# EAGLE board SparkFun GPS NEO_M9N_SMA-Panel (EAGLE 9.6.2), part 1 of 2
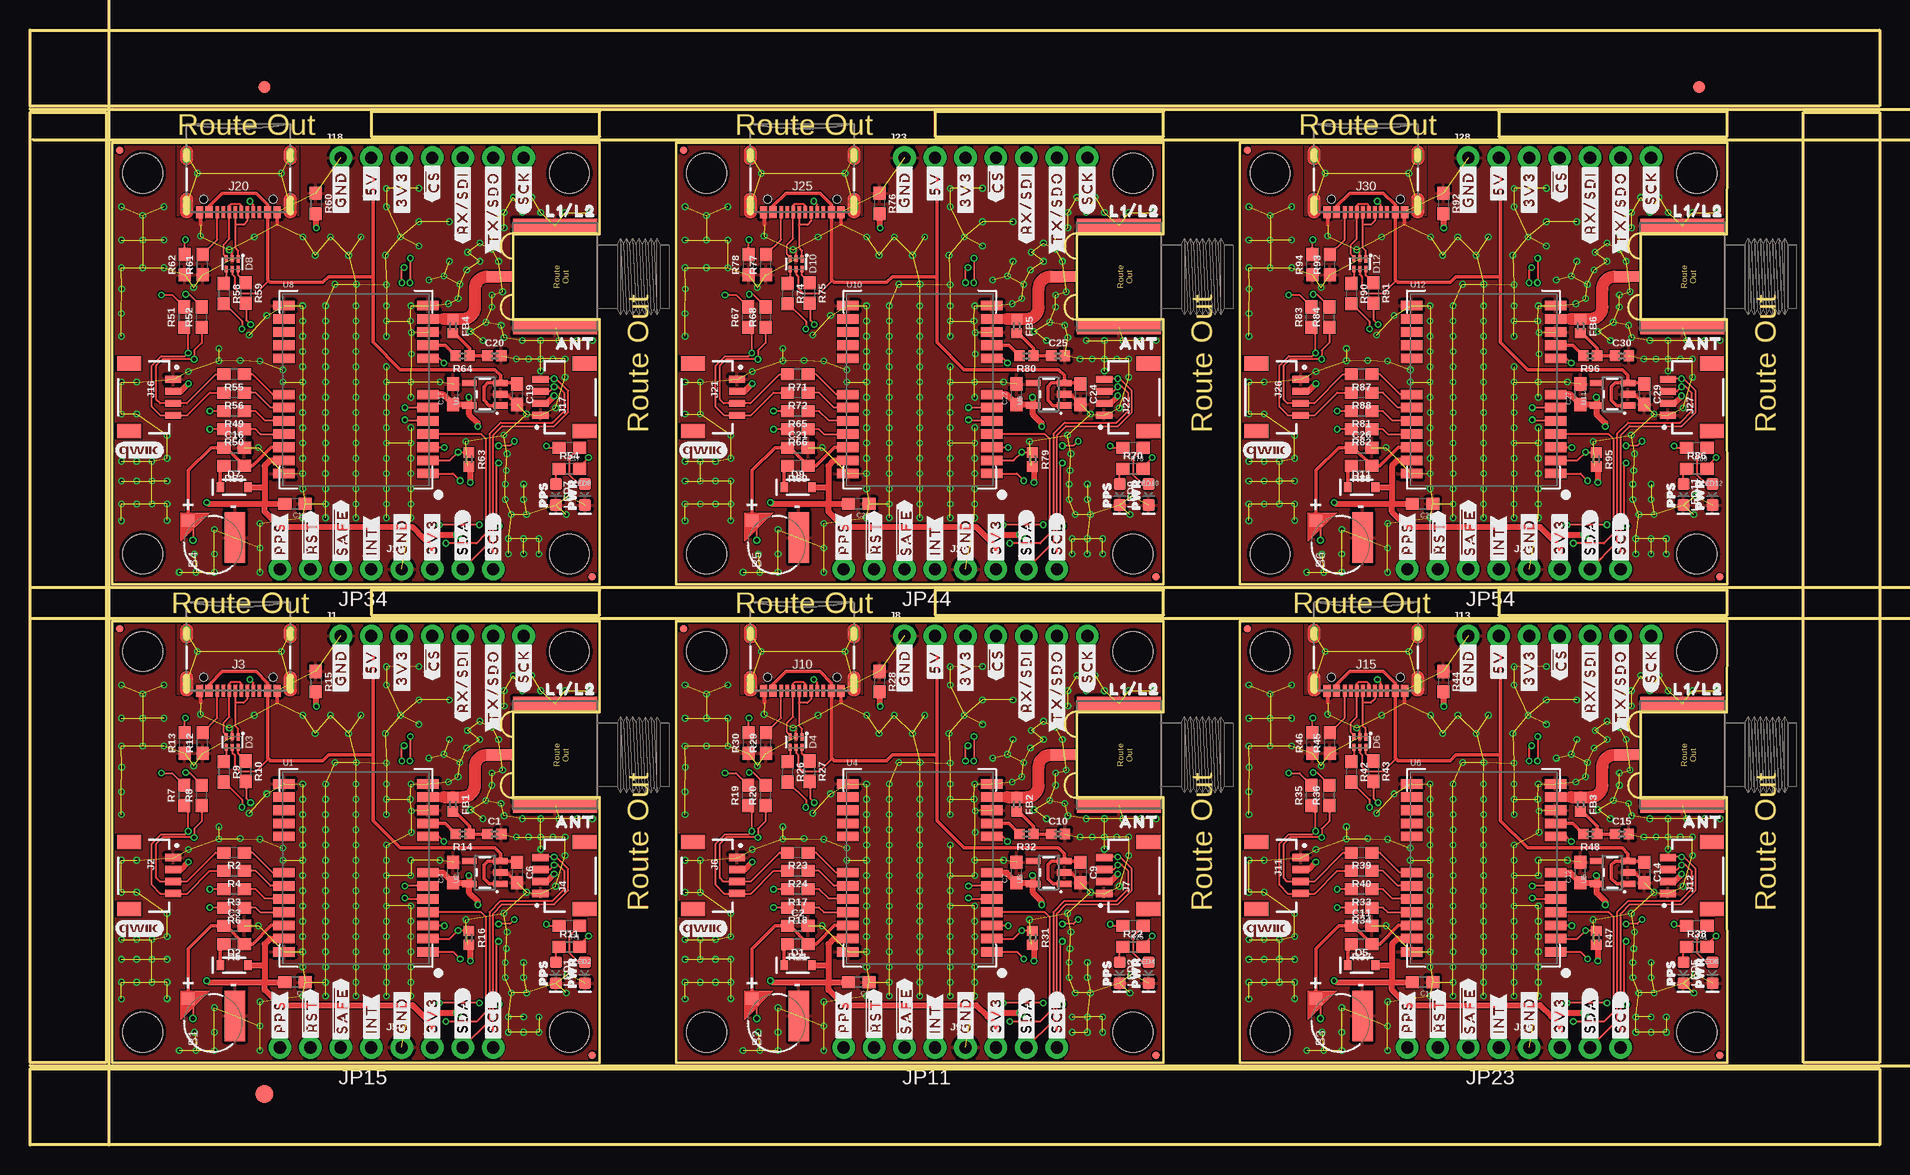
[diagram p0: board, top side]
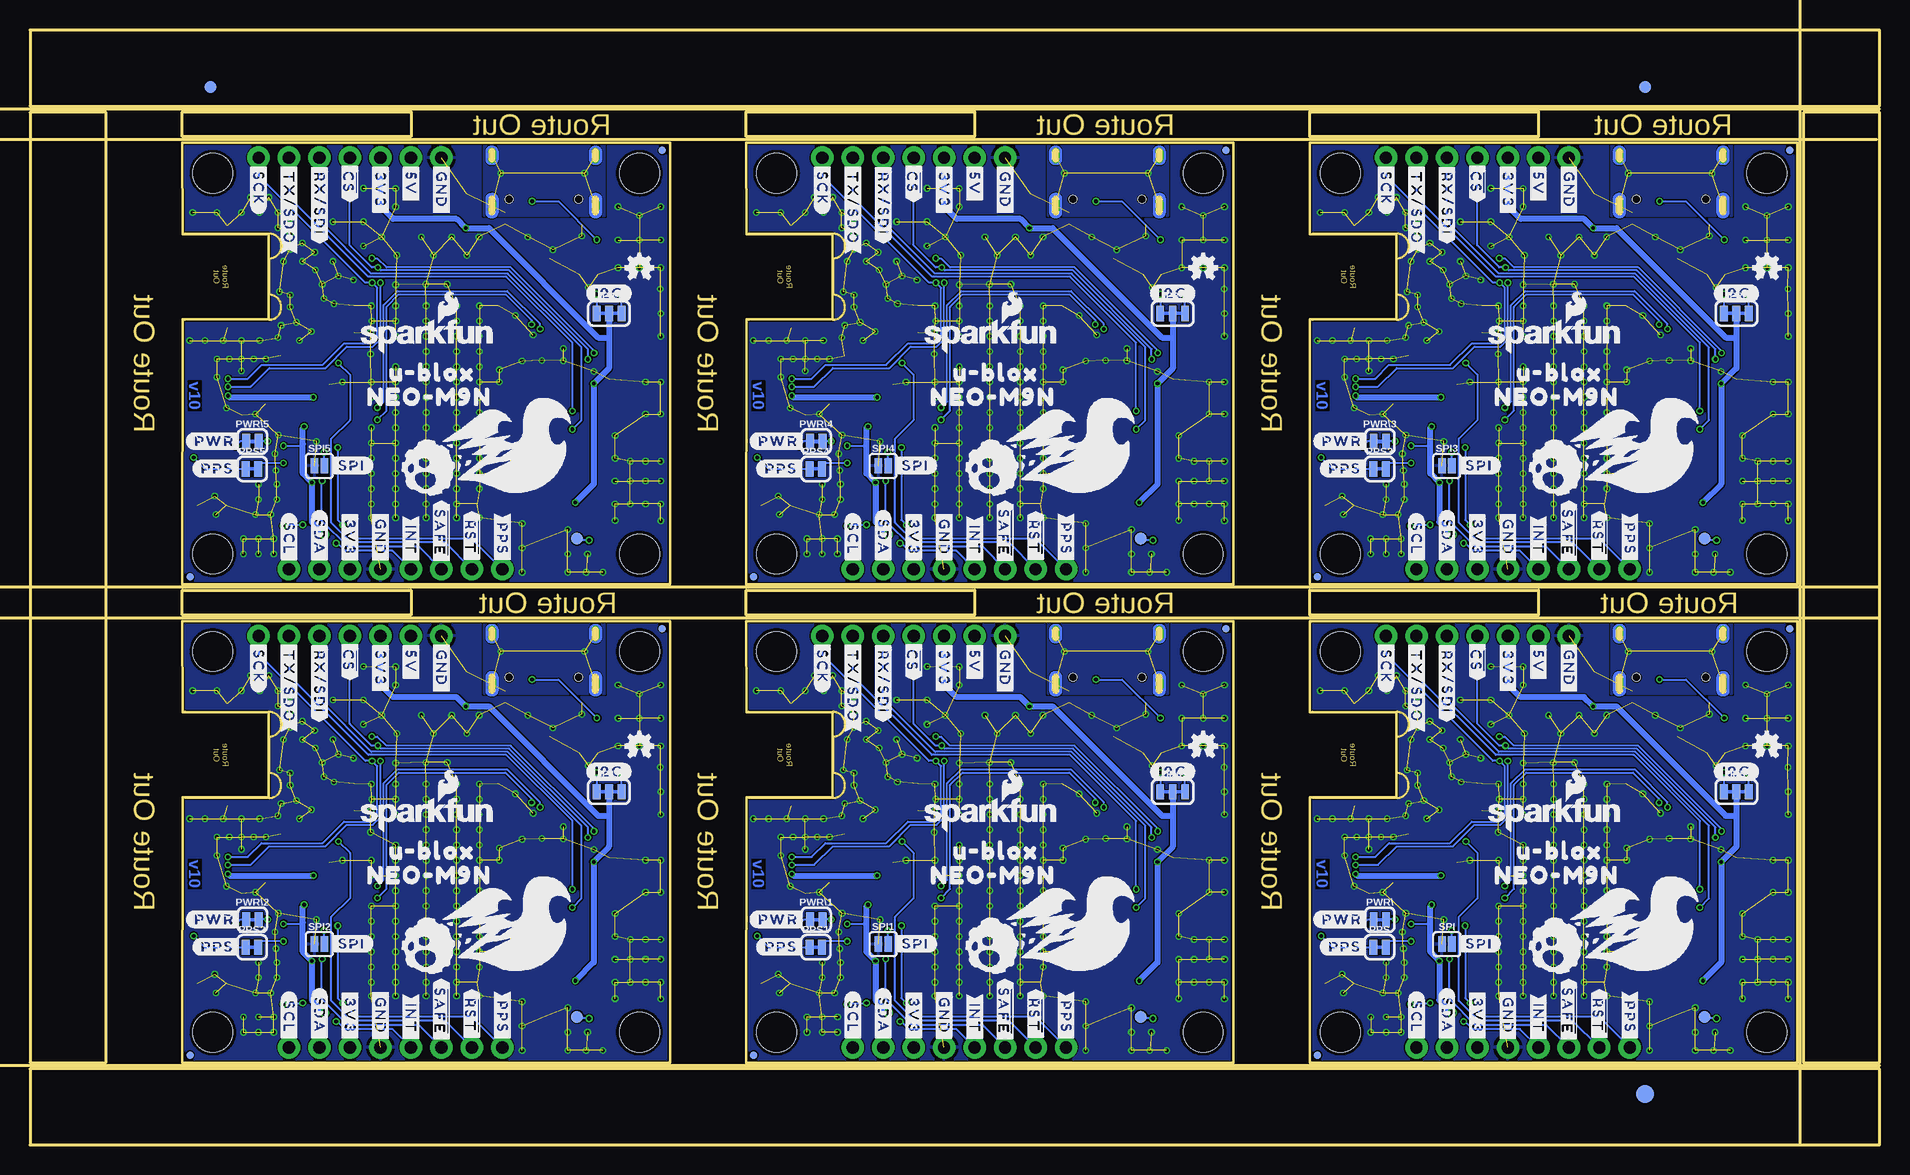
[diagram p1: board, bottom side, seen from below]

Size 154.18 x 92.91 mm. Coordinates in mm from the lower left corner, seen from the top.
Outline: 6.86,6.86 6.86,43.66 47.5,43.66 47.47,36.04 40.28,36.04 40.28,28.96 47.47,28.96 47.5,6.86 6.86,6.86
Outline: 53.85,6.86 53.85,43.66 94.49,43.66 94.46,36.04 87.27,36.04 87.27,28.96 94.46,28.96 94.49,6.86 53.85,6.86
Outline: 100.84,6.86 100.84,43.66 141.48,43.66 141.45,36.04 134.26,36.04 134.26,28.96 141.45,28.96 141.48,6.86 100.84,6.86
Outline: 6.86,46.71 6.86,83.52 47.5,83.52 47.47,75.9 40.28,75.9 40.28,68.81 47.47,68.81 47.5,46.71 6.86,46.71
Outline: 53.85,46.71 53.85,83.52 94.49,83.52 94.46,75.9 87.27,75.9 87.27,68.81 94.46,68.81 94.49,46.71 53.85,46.71
Outline: 100.84,46.71 100.84,83.52 141.48,83.52 141.45,75.9 134.26,75.9 134.26,68.81 141.45,68.81 141.48,46.71 100.84,46.71
Outline: 0,6.35 154.18,6.35 154.18,0 0,0 0,6.35
Outline: 147.83,86.06 154.18,86.06 154.18,6.86 147.83,6.86 147.83,86.06
Outline: 0,92.91 154.18,92.91 154.18,86.56 0,86.56 0,92.91
Outline: 0,86.06 6.35,86.06 6.35,6.86 0,6.86 0,86.06
Outline: 75.44,86.11 75.44,84.02 94.49,84.02 94.49,86.11 75.44,86.11
Outline: 28.45,86.11 28.45,84.02 47.5,84.02 47.5,86.11 28.45,86.11
Outline: 28.45,46.23 28.45,44.14 47.5,44.14 47.5,46.23 28.45,46.23
Outline: 75.44,46.23 75.44,44.14 94.49,44.14 94.49,46.23 75.44,46.23
Outline: 122.43,46.23 122.43,44.14 141.48,44.14 141.48,46.23 122.43,46.23
Outline: 122.43,86.11 122.43,84.02 141.48,84.02 141.48,86.11 122.43,86.11
Copper layers (1*16): Top 0.035mm / dielectric 1.5mm / Bottom 0.035mm
Design rules "SparkFun GPS NEO_M9N_SMA": minimum track width 4mil, minimum drill 6mil, track to track 4mil, track to pad 4mil, pad to pad 4mil, via to via 4mil, smd to smd 4mil, copper to edge 4mil, drill to drill 4mil, minimum pad ring 5mil, minimum via ring 5mil, stop-mask expansion 4mil, vias tented up to drill 25mil, thermal gap 10mil
Net classes: 2 3.3V: width 0.508 mm; 3 Antenna: width 1 mm, clearance 0.3 mm
Milling: 6 lines

## Footprints (pad centres in the part's own frame; a part is rotated, then mirrored left to right if it is on the bottom)
ML414H_IV01E = smd 1 x 1: + 2.022,2.032 | smd 4.2 x 1.7: - 0.6,-1.85
0402 = smd 0.85 x 0.9: 1 -0.58,0; 2 0.58,0
0603 = smd 1.1 x 1: 1 -0.85,0; 2 0.85,0
SOD-323 = smd 0.63 x 0.83: A 1.15,0; C -1.15,0
SOT886 = smd 0.61 x 0.25: 1 -0.405,0.5 | smd 0.56 x 0.25: 2 -0.43,0; 3 -0.43,-0.5; 4 0.43,-0.5; 5 0.43,0; 6 0.43,0.5
SMA-EDGE-SMD = smd 1.15 x 7: GND@0 -4.25,-3.5; GND@1 4.25,-3.5 | smd 0.9 x 2.2: SIG 0,-8.1
FIDUCIAL-1X2 = smd 1 x 1: 1 0,0
FIDUCIAL-1.5X3 = smd 1.5 x 1.5: 1 0,0
1X07_NO_SILK = drill 1.016 pad 1.88: 1 0,0; 2 2.54,0; 3 5.08,0; 4 7.62,0; 5 10.16,0; 6 12.7,0; 7 15.24,0
JST04_1MM_RA = smd 0.6 x 1.35: 1 -1.5,0; 2 -0.5,0; 3 0.5,0; 4 1.5,0 | smd 1.2 x 2: NC1 2.8,-3.675; NC2 -2.8,-3.675
USB-C-16P-2LAYER-PADS = smd 0.3 x 1: A5 -1.25,-0.34; A6 -0.25,-0.34; A7 0.25,-0.34; A8 1.25,-0.34; B5 1.75,-0.34; B6 0.75,-0.34; B7 -0.75,-0.34; B8 -1.75,-0.34 | smd 0.6 x 1: GND -3.225,-0.34; GND2 3.225,-0.34; VBUS1 -2.45,-0.34; VBUS2 2.45,-0.34 | drill 0.4 pad 0.6 long: SHLD1 -4.318,-0.915; SHLD2 4.318,-0.915; SHLD3 -4.318,-5.095; SHLD4 4.318,-5.095 | hole 0.65: -2.89,-1.445; 2.89,-1.445
1X04_NO_SILK = drill 1.016 pad 1.88: 1 0,0; 2 2.54,0; 3 5.08,0; 4 7.62,0
STAND-OFF = hole 3.302: 0,0
MICRO-FIDUCIAL = smd 0.635 x 0.635: 1 0,0
SMT-JUMPER_3_2-NC_TRACE_SILK = smd 0.66 x 1.27: 1 -1.041,0; 2 0,0; 3 1.041,0
LED-0603 = smd 1 x 1: A -0.877,0; C 0.877,0
SMT-JUMPER_2_NC_TRACE_SILK = smd 0.66 x 1.27: 1 -0.521,0; 2 0.521,0
SMT-JUMPER_2_NO_SILK = smd 0.635 x 1.27: 1 -0.406,0; 2 0.406,0
PAD.03X.04 = smd 1.016 x 1.016: P$1 0,0
NEO-M9N/M8T/M8U = smd 1.8 x 0.8: 1 6,-7; 2 6,-5.9; 3 6,-4.8; 4 6,-3.7; 5 6,-2.6; 6 6,-1.5; 7 6,-0.4; 8 6,2.6; 9 6,3.7; 10 6,4.8; 11 6,5.9; 12 6,7; 13 -6,7; 14 -6,5.9; 15 -6,4.8; 16 -6,3.7; 17 -6,2.6; 18 -6,-0.4; 19 -6,-1.5; 20 -6,-2.6; 21 -6,-3.7; 22 -6,-4.8; 23 -6,-5.9; 24 -6,-7
SOT23-5 = smd 0.55 x 1.2: 1 -0.95,-1.3; 2 0,-1.3; 3 0.95,-1.3; 4 0.95,1.3; 5 -0.95,1.3

## Placement (x,y rotation side)
B1  6.8MM_COIN_CELL  [ML414H_IV01E]  15.24,10.16 90 top
B2  6.8MM_COIN_CELL  [ML414H_IV01E]  62.23,10.16 90 top
B3  6.8MM_COIN_CELL  [ML414H_IV01E]  109.22,10.16 90 top
B4  6.8MM_COIN_CELL  [ML414H_IV01E]  15.24,50.01 90 top
B5  6.8MM_COIN_CELL  [ML414H_IV01E]  62.23,50.01 90 top
B6  6.8MM_COIN_CELL  [ML414H_IV01E]  109.22,50.01 90 top
C1  47pF  [0402]  38.71,25.91 0 top
C2  1.0uF  [0603]  64.01,18.26 0 top
C3  1.0uF  [0603]  17.02,18.26 0 top
C4  1.0uF  [0603]  35.26,22.71 90 top
C5  0.1uF  [0603]  22.1,13.56 180 top
C6  1.0uF  [0603]  40.59,22.71 270 top
C7  1.0uF  [0603]  82.25,22.71 90 top
C8  0.1uF  [0603]  69.09,13.56 180 top
C9  1.0uF  [0603]  87.58,22.71 270 top
C10  47pF  [0402]  85.7,25.91 0 top
C11  1.0uF  [0603]  111,18.26 0 top
C12  1.0uF  [0603]  129.24,22.71 90 top
C13  0.1uF  [0603]  116.08,13.56 180 top
C14  1.0uF  [0603]  134.57,22.71 270 top
C15  47pF  [0402]  132.69,25.91 0 top
C16  1.0uF  [0603]  17.02,58.12 0 top
C17  1.0uF  [0603]  35.26,62.56 90 top
C18  0.1uF  [0603]  22.1,53.42 180 top
C19  1.0uF  [0603]  40.59,62.56 270 top
C20  47pF  [0402]  38.71,65.76 0 top
C21  1.0uF  [0603]  64.01,58.12 0 top
C22  1.0uF  [0603]  82.25,62.56 90 top
C23  0.1uF  [0603]  69.09,53.42 180 top
C24  1.0uF  [0603]  87.58,62.56 270 top
C25  47pF  [0402]  85.7,65.76 0 top
C26  1.0uF  [0603]  111,58.12 0 top
C27  1.0uF  [0603]  129.24,62.56 90 top
C28  0.1uF  [0603]  116.08,53.42 180 top
C29  1.0uF  [0603]  134.57,62.56 270 top
C30  47pF  [0402]  132.69,65.76 0 top
D1  0.5A/40V/420mV  [SOD-323]  64.01,14.96 0 top
D2  0.5A/40V/420mV  [SOD-323]  17.02,14.96 0 top
D3  PRTR5V0U2F  [SOT886]  16.87,33.58 270 top
D4  PRTR5V0U2F  [SOT886]  63.86,33.58 270 top
D5  0.5A/40V/420mV  [SOD-323]  111,14.96 0 top
D6  PRTR5V0U2F  [SOT886]  110.85,33.58 270 top
D7  0.5A/40V/420mV  [SOD-323]  17.02,54.81 0 top
D8  PRTR5V0U2F  [SOT886]  16.87,73.43 270 top
D9  0.5A/40V/420mV  [SOD-323]  64.01,54.81 0 top
D10  PRTR5V0U2F  [SOT886]  63.86,73.43 270 top
D11  0.5A/40V/420mV  [SOD-323]  111,54.81 0 top
D12  PRTR5V0U2F  [SOT886]  110.85,73.43 270 top
E1  ANTENNA-GROUNDEDEDGE_SMA_SMD  [SMA-EDGE-SMD]  47.27,32.51 270 top
E2  ANTENNA-GROUNDEDEDGE_SMA_SMD  [SMA-EDGE-SMD]  94.26,32.51 270 top
E3  ANTENNA-GROUNDEDEDGE_SMA_SMD  [SMA-EDGE-SMD]  141.25,32.51 270 top
E4  ANTENNA-GROUNDEDEDGE_SMA_SMD  [SMA-EDGE-SMD]  47.27,72.36 270 top
E5  ANTENNA-GROUNDEDEDGE_SMA_SMD  [SMA-EDGE-SMD]  94.26,72.36 270 top
E6  ANTENNA-GROUNDEDEDGE_SMA_SMD  [SMA-EDGE-SMD]  141.25,72.36 270 top
E$1  [FIDUCIAL-1X2]  19.56,88.15 0 top
E$2  [FIDUCIAL-1X2]  19.56,88.15 0 bottom
E$3  [FIDUCIAL-1X2]  139.13,88.15 0 top
E$4  [FIDUCIAL-1X2]  139.13,88.15 0 bottom
E$5  [FIDUCIAL-1.5X3]  19.56,4.25 0 top
E$6  [FIDUCIAL-1.5X3]  19.56,4.25 0 bottom
FB1  FERRITE_BEAD-120_OHM-0402  [0402]  35.26,28.37 270 top
FB2  FERRITE_BEAD-120_OHM-0402  [0402]  82.25,28.37 270 top
FB3  FERRITE_BEAD-120_OHM-0402  [0402]  129.24,28.37 270 top
FB4  FERRITE_BEAD-120_OHM-0402  [0402]  35.26,68.22 270 top
FB5  FERRITE_BEAD-120_OHM-0402  [0402]  82.25,68.22 270 top
FB6  FERRITE_BEAD-120_OHM-0402  [0402]  129.24,68.22 270 top
J1  [1X07_NO_SILK]  25.91,42.42 0 top
J2  Qwiic Right Angle  [JST04_1MM_RA]  11.94,22.45 270 top
J3  [USB-C-16P-2LAYER-PADS]  17.37,37.52 180 top
J4  Qwiic Right Angle  [JST04_1MM_RA]  42.54,22.45 90 top
J5  [1X04_NO_SILK]  30.99,8.13 0 top
J6  Qwiic Right Angle  [JST04_1MM_RA]  58.93,22.45 270 top
J7  Qwiic Right Angle  [JST04_1MM_RA]  89.54,22.45 90 top
J8  [1X07_NO_SILK]  72.9,42.42 0 top
J9  [1X04_NO_SILK]  77.98,8.13 0 top
J10  [USB-C-16P-2LAYER-PADS]  64.36,37.52 180 top
J11  Qwiic Right Angle  [JST04_1MM_RA]  105.92,22.45 270 top
J12  Qwiic Right Angle  [JST04_1MM_RA]  136.53,22.45 90 top
J13  [1X07_NO_SILK]  119.89,42.42 0 top
J14  [1X04_NO_SILK]  124.97,8.13 0 top
J15  [USB-C-16P-2LAYER-PADS]  111.35,37.52 180 top
J16  Qwiic Right Angle  [JST04_1MM_RA]  11.94,62.31 270 top
J17  Qwiic Right Angle  [JST04_1MM_RA]  42.54,62.31 90 top
J18  [1X07_NO_SILK]  25.91,82.27 0 top
J19  [1X04_NO_SILK]  30.99,47.98 0 top
J20  [USB-C-16P-2LAYER-PADS]  17.37,77.37 180 top
J21  Qwiic Right Angle  [JST04_1MM_RA]  58.93,62.31 270 top
J22  Qwiic Right Angle  [JST04_1MM_RA]  89.54,62.31 90 top
J23  [1X07_NO_SILK]  72.9,82.27 0 top
J24  [1X04_NO_SILK]  77.98,47.98 0 top
J25  [USB-C-16P-2LAYER-PADS]  64.36,77.37 180 top
J26  Qwiic Right Angle  [JST04_1MM_RA]  105.92,62.31 270 top
J27  Qwiic Right Angle  [JST04_1MM_RA]  136.53,62.31 90 top
J28  [1X07_NO_SILK]  119.89,82.27 0 top
J29  [1X04_NO_SILK]  124.97,47.98 0 top
J30  [USB-C-16P-2LAYER-PADS]  111.35,77.37 180 top
JP1  STAND-OFF  [STAND-OFF]  44.96,41.12 0 top
JP2  STAND-OFF  [STAND-OFF]  56.39,41.12 0 top
JP3  FIDUCIALUFIDUCIAL  [MICRO-FIDUCIAL]  93.85,7.49 0 top
JP4  FIDUCIALUFIDUCIAL  [MICRO-FIDUCIAL]  54.48,43.03 0 top
JP5  JUMPER-SMT_3_2-NC_TRACE_SILK  [SMT-JUMPER_3_2-NC_TRACE_SILK]  11.94,29.44 0 bottom
JP6  JUMPER-SMT_3_2-NC_TRACE_SILK  [SMT-JUMPER_3_2-NC_TRACE_SILK]  58.93,29.44 0 bottom
JP7  FIDUCIALUFIDUCIAL  [MICRO-FIDUCIAL]  93.85,7.49 0 bottom
JP8  FIDUCIALUFIDUCIAL  [MICRO-FIDUCIAL]  54.48,43.03 0 bottom
JP9  STAND-OFF  [STAND-OFF]  56.39,9.4 0 top
JP10  STAND-OFF  [STAND-OFF]  91.95,9.4 0 top
JP11  [1X04_NO_SILK]  75.44,8.13 180 top
JP12  STAND-OFF  [STAND-OFF]  91.95,41.12 0 top
JP13  STAND-OFF  [STAND-OFF]  103.38,41.12 0 top
JP14  FIDUCIALUFIDUCIAL  [MICRO-FIDUCIAL]  140.84,7.49 0 top
JP15  [1X04_NO_SILK]  28.45,8.13 180 top
JP16  FIDUCIALUFIDUCIAL  [MICRO-FIDUCIAL]  101.47,43.03 0 top
JP17  JUMPER-SMT_3_2-NC_TRACE_SILK  [SMT-JUMPER_3_2-NC_TRACE_SILK]  105.92,29.44 0 bottom
JP18  FIDUCIALUFIDUCIAL  [MICRO-FIDUCIAL]  140.84,7.49 0 bottom
JP19  FIDUCIALUFIDUCIAL  [MICRO-FIDUCIAL]  101.47,43.03 0 bottom
JP20  STAND-OFF  [STAND-OFF]  103.38,9.4 0 top
JP21  FIDUCIALUFIDUCIAL  [MICRO-FIDUCIAL]  46.86,7.49 0 top
JP22  STAND-OFF  [STAND-OFF]  138.94,9.4 0 top
JP23  [1X04_NO_SILK]  122.43,8.13 180 top
JP24  STAND-OFF  [STAND-OFF]  138.94,41.12 0 top
JP25  STAND-OFF  [STAND-OFF]  9.4,80.98 0 top
JP26  FIDUCIALUFIDUCIAL  [MICRO-FIDUCIAL]  46.86,47.35 0 top
JP27  FIDUCIALUFIDUCIAL  [MICRO-FIDUCIAL]  7.49,82.88 0 top
JP28  JUMPER-SMT_3_2-NC_TRACE_SILK  [SMT-JUMPER_3_2-NC_TRACE_SILK]  11.94,69.29 0 bottom
JP29  FIDUCIALUFIDUCIAL  [MICRO-FIDUCIAL]  46.86,47.35 0 bottom
JP30  FIDUCIALUFIDUCIAL  [MICRO-FIDUCIAL]  7.49,82.88 0 bottom
JP31  STAND-OFF  [STAND-OFF]  9.4,41.12 0 top
JP32  STAND-OFF  [STAND-OFF]  9.4,49.25 0 top
JP33  STAND-OFF  [STAND-OFF]  44.96,49.25 0 top
JP34  [1X04_NO_SILK]  28.45,47.98 180 top
JP35  STAND-OFF  [STAND-OFF]  44.96,80.98 0 top
JP36  STAND-OFF  [STAND-OFF]  56.39,80.98 0 top
JP37  FIDUCIALUFIDUCIAL  [MICRO-FIDUCIAL]  93.85,47.35 0 top
JP38  FIDUCIALUFIDUCIAL  [MICRO-FIDUCIAL]  54.48,82.88 0 top
JP39  JUMPER-SMT_3_2-NC_TRACE_SILK  [SMT-JUMPER_3_2-NC_TRACE_SILK]  58.93,69.29 0 bottom
JP40  FIDUCIALUFIDUCIAL  [MICRO-FIDUCIAL]  93.85,47.35 0 bottom
JP41  FIDUCIALUFIDUCIAL  [MICRO-FIDUCIAL]  54.48,82.88 0 bottom
JP42  STAND-OFF  [STAND-OFF]  56.39,49.25 0 top
JP43  STAND-OFF  [STAND-OFF]  91.95,49.25 0 top
JP44  [1X04_NO_SILK]  75.44,47.98 180 top
JP45  STAND-OFF  [STAND-OFF]  91.95,80.98 0 top
JP46  STAND-OFF  [STAND-OFF]  103.38,80.98 0 top
JP47  FIDUCIALUFIDUCIAL  [MICRO-FIDUCIAL]  140.84,47.35 0 top
JP48  FIDUCIALUFIDUCIAL  [MICRO-FIDUCIAL]  101.47,82.88 0 top
JP49  JUMPER-SMT_3_2-NC_TRACE_SILK  [SMT-JUMPER_3_2-NC_TRACE_SILK]  105.92,69.29 0 bottom
JP50  FIDUCIALUFIDUCIAL  [MICRO-FIDUCIAL]  140.84,47.35 0 bottom
JP51  FIDUCIALUFIDUCIAL  [MICRO-FIDUCIAL]  101.47,82.88 0 bottom
JP52  STAND-OFF  [STAND-OFF]  103.38,49.25 0 top
JP53  STAND-OFF  [STAND-OFF]  138.94,49.25 0 top
JP54  [1X04_NO_SILK]  122.43,47.98 180 top
JP55  STAND-OFF  [STAND-OFF]  138.94,80.98 0 top
JP61  FIDUCIALUFIDUCIAL  [MICRO-FIDUCIAL]  7.49,43.03 0 top
JP71  FIDUCIALUFIDUCIAL  [MICRO-FIDUCIAL]  46.86,7.49 0 bottom
JP81  FIDUCIALUFIDUCIAL  [MICRO-FIDUCIAL]  7.49,43.03 0 bottom
JP91  STAND-OFF  [STAND-OFF]  9.4,9.4 0 top
JP101  STAND-OFF  [STAND-OFF]  44.96,9.4 0 top
LED1  BLUE  [LED-0603]  43.84,14.35 270 top
LED2  RED  [LED-0603]  46.25,14.35 270 top
LED3  BLUE  [LED-0603]  90.83,14.35 270 top
LED4  RED  [LED-0603]  93.24,14.35 270 top
LED5  BLUE  [LED-0603]  137.82,14.35 270 top
LED6  RED  [LED-0603]  140.23,14.35 270 top
LED7  BLUE  [LED-0603]  43.84,54.2 270 top
LED8  RED  [LED-0603]  46.25,54.2 270 top
LED9  BLUE  [LED-0603]  90.83,54.2 270 top
LED10  RED  [LED-0603]  93.24,54.2 270 top
LED11  BLUE  [LED-0603]  137.82,54.2 270 top
LED12  RED  [LED-0603]  140.23,54.2 270 top
LOGO1  OSHW-LOGOMINI  [OSHW-LOGO-MINI]  9.4,33.25 0 bottom
LOGO2  SFE_LOGO_NAME_FLAME.1_INCH  [SFE_LOGO_NAME_FLAME_.1]  27.05,27.53 0 bottom
LOGO3  OSHW-LOGOMINI  [OSHW-LOGO-MINI]  56.39,33.25 0 bottom
LOGO4  SFE_LOGO_NAME_FLAME.1_INCH  [SFE_LOGO_NAME_FLAME_.1]  74.04,27.53 0 bottom
LOGO5  OSHW-LOGOMINI  [OSHW-LOGO-MINI]  103.38,33.25 0 bottom
LOGO6  SFE_LOGO_NAME_FLAME.1_INCH  [SFE_LOGO_NAME_FLAME_.1]  121.03,27.53 0 bottom
LOGO7  OSHW-LOGOMINI  [OSHW-LOGO-MINI]  9.4,73.1 0 bottom
LOGO8  SFE_LOGO_NAME_FLAME.1_INCH  [SFE_LOGO_NAME_FLAME_.1]  27.05,67.39 0 bottom
LOGO9  OSHW-LOGOMINI  [OSHW-LOGO-MINI]  56.39,73.1 0 bottom
LOGO10  SFE_LOGO_NAME_FLAME.1_INCH  [SFE_LOGO_NAME_FLAME_.1]  74.04,67.39 0 bottom
LOGO11  OSHW-LOGOMINI  [OSHW-LOGO-MINI]  103.38,73.1 0 bottom
LOGO12  SFE_LOGO_NAME_FLAME.1_INCH  [SFE_LOGO_NAME_FLAME_.1]  121.03,67.39 0 bottom
PPS  JUMPER-SMT_2_NC_TRACE_SILK  [SMT-JUMPER_2_NC_TRACE_SILK]  41.68,16.48 0 bottom
PPS1  JUMPER-SMT_2_NC_TRACE_SILK  [SMT-JUMPER_2_NC_TRACE_SILK]  88.67,16.48 0 bottom
PPS2  JUMPER-SMT_2_NC_TRACE_SILK  [SMT-JUMPER_2_NC_TRACE_SILK]  135.66,16.48 0 bottom
PPS3  JUMPER-SMT_2_NC_TRACE_SILK  [SMT-JUMPER_2_NC_TRACE_SILK]  41.68,56.34 0 bottom
PPS4  JUMPER-SMT_2_NC_TRACE_SILK  [SMT-JUMPER_2_NC_TRACE_SILK]  88.67,56.34 0 bottom
PPS5  JUMPER-SMT_2_NC_TRACE_SILK  [SMT-JUMPER_2_NC_TRACE_SILK]  135.66,56.34 0 bottom
PWR\  JUMPER-SMT_2_NC_TRACE_SILK  [SMT-JUMPER_2_NC_TRACE_SILK]  41.66,18.77 0 bottom
PWR\1  JUMPER-SMT_2_NC_TRACE_SILK  [SMT-JUMPER_2_NC_TRACE_SILK]  88.65,18.77 0 bottom
PWR\2  JUMPER-SMT_2_NC_TRACE_SILK  [SMT-JUMPER_2_NC_TRACE_SILK]  135.64,18.77 0 bottom
PWR\3  JUMPER-SMT_2_NC_TRACE_SILK  [SMT-JUMPER_2_NC_TRACE_SILK]  41.66,58.62 0 bottom
PWR\4  JUMPER-SMT_2_NC_TRACE_SILK  [SMT-JUMPER_2_NC_TRACE_SILK]  88.65,58.62 0 bottom
PWR\5  JUMPER-SMT_2_NC_TRACE_SILK  [SMT-JUMPER_2_NC_TRACE_SILK]  135.64,58.62 0 bottom
R1  1k  [0603]  44.96,18.26 180 top
R2  33  [0603]  17.02,24.36 180 top
R3  33  [0603]  17.02,21.31 180 top
R4  33  [0603]  17.02,22.83 180 top
R5  1k  [0603]  17.02,16.74 180 top
R6  33  [0603]  17.02,19.79 180 top
R7  2.2k  [0603]  12.85,29.13 90 top
R8  2.2k  [0603]  14.33,29.13 90 top
R9  27  [0603]  16.15,31.09 270 top
R10  27  [0603]  17.98,31.14 270 top
R11  1k  [0603]  44.96,16.51 0 top
R12  5.1k  [0603]  14.38,33.5 90 top
R13  5.1k  [0603]  12.9,33.5 90 top
R14  33  [0402]  36.07,25.91 180 top
R15  100k  [0603]  23.83,38.61 270 top
R16  10k  [0402]  36.58,17.27 270 top
R17  33  [0603]  64.01,21.31 180 top
R18  33  [0603]  64.01,19.79 180 top
R19  2.2k  [0603]  59.84,29.13 90 top
R20  2.2k  [0603]  61.32,29.13 90 top
R21  1k  [0603]  64.01,16.74 180 top
R22  1k  [0603]  91.95,16.51 0 top
R23  33  [0603]  64.01,24.36 180 top
R24  33  [0603]  64.01,22.83 180 top
R25  1k  [0603]  91.95,18.26 180 top
R26  27  [0603]  63.14,31.09 270 top
R27  27  [0603]  64.97,31.14 270 top
R28  100k  [0603]  70.82,38.61 270 top
R29  5.1k  [0603]  61.37,33.5 90 top
R30  5.1k  [0603]  59.89,33.5 90 top
R31  10k  [0402]  83.57,17.27 270 top
R32  33  [0402]  83.06,25.91 180 top
R33  33  [0603]  111,21.31 180 top
R34  33  [0603]  111,19.79 180 top
R35  2.2k  [0603]  106.83,29.13 90 top
R36  2.2k  [0603]  108.31,29.13 90 top
R37  1k  [0603]  111,16.74 180 top
R38  1k  [0603]  138.94,16.51 0 top
R39  33  [0603]  111,24.36 180 top
R40  33  [0603]  111,22.83 180 top
R41  1k  [0603]  138.94,18.26 180 top
R42  27  [0603]  110.13,31.09 270 top
R43  27  [0603]  111.96,31.14 270 top
R44  100k  [0603]  117.81,38.61 270 top
R45  5.1k  [0603]  108.36,33.5 90 top
R46  5.1k  [0603]  106.88,33.5 90 top
R47  10k  [0402]  130.56,17.27 270 top
R48  33  [0402]  130.05,25.91 180 top
R49  33  [0603]  17.02,61.16 180 top
R50  33  [0603]  17.02,59.64 180 top
R51  2.2k  [0603]  12.85,68.99 90 top
R52  2.2k  [0603]  14.33,68.99 90 top
R53  1k  [0603]  17.02,56.59 180 top
R54  1k  [0603]  44.96,56.36 0 top
R55  33  [0603]  17.02,64.21 180 top
R56  33  [0603]  17.02,62.69 180 top
R57  1k  [0603]  44.96,58.12 180 top
R58  27  [0603]  16.15,70.94 270 top
R59  27  [0603]  17.98,70.99 270 top
R60  100k  [0603]  23.83,78.46 270 top
R61  5.1k  [0603]  14.38,73.36 90 top
R62  5.1k  [0603]  12.9,73.36 90 top
R63  10k  [0402]  36.58,57.12 270 top
R64  33  [0402]  36.07,65.76 180 top
R65  33  [0603]  64.01,61.16 180 top
R66  33  [0603]  64.01,59.64 180 top
R67  2.2k  [0603]  59.84,68.99 90 top
R68  2.2k  [0603]  61.32,68.99 90 top
R69  1k  [0603]  64.01,56.59 180 top
R70  1k  [0603]  91.95,56.36 0 top
R71  33  [0603]  64.01,64.21 180 top
R72  33  [0603]  64.01,62.69 180 top
R73  1k  [0603]  91.95,58.12 180 top
R74  27  [0603]  63.14,70.94 270 top
R75  27  [0603]  64.97,70.99 270 top
R76  100k  [0603]  70.82,78.46 270 top
R77  5.1k  [0603]  61.37,73.36 90 top
R78  5.1k  [0603]  59.89,73.36 90 top
R79  10k  [0402]  83.57,57.12 270 top
R80  33  [0402]  83.06,65.76 180 top
R81  33  [0603]  111,61.16 180 top
R82  33  [0603]  111,59.64 180 top
R83  2.2k  [0603]  106.83,68.99 90 top
R84  2.2k  [0603]  108.31,68.99 90 top
R85  1k  [0603]  111,56.59 180 top
R86  1k  [0603]  138.94,56.36 0 top
R87  33  [0603]  111,64.21 180 top
R88  33  [0603]  111,62.69 180 top
R89  1k  [0603]  138.94,58.12 180 top
R90  27  [0603]  110.13,70.94 270 top
R91  27  [0603]  111.96,70.99 270 top
R92  100k  [0603]  117.81,78.46 270 top
R93  5.1k  [0603]  108.36,73.36 90 top
R94  5.1k  [0603]  106.88,73.36 90 top
R95  10k  [0402]  130.56,57.12 270 top
R96  33  [0402]  130.05,65.76 180 top
SPI  JUMPER-SMT_2_NO_SILK  [SMT-JUMPER_2_NO_SILK]  36.07,16.74 0 bottom
SPI1  JUMPER-SMT_2_NO_SILK  [SMT-JUMPER_2_NO_SILK]  83.06,16.74 0 bottom
SPI2  JUMPER-SMT_2_NO_SILK  [SMT-JUMPER_2_NO_SILK]  130.05,16.74 0 bottom
SPI3  JUMPER-SMT_2_NO_SILK  [SMT-JUMPER_2_NO_SILK]  36.07,56.59 0 bottom
SPI4  JUMPER-SMT_2_NO_SILK  [SMT-JUMPER_2_NO_SILK]  83.06,56.59 0 bottom
SPI5  JUMPER-SMT_2_NO_SILK  [SMT-JUMPER_2_NO_SILK]  130.05,56.59 0 bottom
TP1  TEST-POINT3X4  [PAD.03X.04]  14.61,10.67 0 bottom
TP2  TEST-POINT3X4  [PAD.03X.04]  61.59,10.67 0 bottom
TP3  TEST-POINT3X4  [PAD.03X.04]  108.59,10.67 0 bottom
TP4  TEST-POINT3X4  [PAD.03X.04]  14.61,50.52 0 bottom
TP5  TEST-POINT3X4  [PAD.03X.04]  61.59,50.52 0 bottom
TP6  TEST-POINT3X4  [PAD.03X.04]  108.59,50.52 0 bottom
U1  U-BLOX_NEO-M9N  [NEO-M9N/M8T/M8U]  27.18,23.09 0 top
U2  3.3V  [SOT23-5]  37.92,22.71 90 top
U3  3.3V  [SOT23-5]  84.91,22.71 90 top
U4  U-BLOX_NEO-M9N  [NEO-M9N/M8T/M8U]  74.17,23.09 0 top
U5  3.3V  [SOT23-5]  131.9,22.71 90 top
U6  U-BLOX_NEO-M9N  [NEO-M9N/M8T/M8U]  121.16,23.09 0 top
U7  3.3V  [SOT23-5]  37.92,62.56 90 top
U8  U-BLOX_NEO-M9N  [NEO-M9N/M8T/M8U]  27.18,62.94 0 top
U9  3.3V  [SOT23-5]  84.91,62.56 90 top
U10  U-BLOX_NEO-M9N  [NEO-M9N/M8T/M8U]  74.17,62.94 0 top
U11  3.3V  [SOT23-5]  131.9,62.56 90 top
U12  U-BLOX_NEO-M9N  [NEO-M9N/M8T/M8U]  121.16,62.94 0 top
U$1  [##CS##9]  33.53,40.39 90 top
U$2  [U#BLOX19]  26.67,24.51 0 bottom
U$3  [##SAFE##15]  25.91,11.18 90 top
U$4  [#3V3#6]  33.53,10.79 90 top
U$5  [#3V3#6]  30.99,39.75 90 top
U$6  [#5V#1]  28.45,40.26 90 top
U$7  [#GND#0]  30.99,10.79 90 top
U$8  [#GND#0]  25.91,39.75 90 top
U$9  [#INT#16]  28.45,10.54 90 top
U$10  [PPS7]  42.8,14.35 90 top
U$11  [#PPS#13]  20.83,10.67 90 top
U$12  [#SPI#22]  33.4,16.76 0 bottom
U$13  [PWR6]  45.21,14.35 90 top
U$14  [QWIIC_4MM]  9.14,18.03 0 top
U$15  [#RX#SDI#10]  36.07,38.61 90 top
U$16  [#SCK#12]  41.15,39.88 90 top
U$17  [#PWR#1]  44.83,18.8 0 bottom
U$18  [#SCL#18]  38.61,10.67 90 top
U$19  [#SDA#17]  36.07,10.79 90 top
U$20  [#TX#SDO#11]  38.61,38.23 90 top
U$21  [NEO_GPS_BOARD_SILK_FINAL#03#JPG]  22.1,18.29 0 bottom
U$22  [##SAFE##11]  25.91,11.18 270 bottom
U$23  [L1#L28]  45.08,37.97 0 top
U$24  [ANT8]  45.47,26.92 0 top
U$25  [NEO#M9N20]  26.92,22.48 0 bottom
U$26  [##CS##6]  33.53,40.39 270 bottom
U$27  [##RST##12]  23.37,10.79 270 bottom
U$28  [##RST##2]  23.37,10.79 90 top
U$29  [#I2C#3]  11.94,31.12 0 bottom
U$30  [#INT#10]  28.45,10.54 270 bottom
U$31  [#PPS#0]  44.58,16.51 0 bottom
U$32  [#PPS#13]  20.83,10.67 270 bottom
U$33  [#RX#SDI#4]  36.07,38.61 270 bottom
U$34  [#SCK#3]  41.15,39.88 270 bottom
U$35  [#SCL#8]  38.61,10.67 270 bottom
U$36  [#SDA#9]  36.07,10.79 270 bottom
U$37  [#TX#SDO#5]  38.61,38.23 270 bottom
U$38  [#GND#0]  25.91,39.75 270 bottom
U$39  [#3V3#6]  30.99,39.75 270 bottom
U$40  [#3V3#6]  33.53,10.79 270 bottom
U$41  [#GND#0]  30.99,10.79 270 bottom
U$42  [#5V#1]  28.45,40.26 270 bottom
U$43  [QWIIC_4MM]  56.13,18.03 0 top
U$44  [NEO_GPS_BOARD_SILK_FINAL#03#JPG]  69.09,18.29 0 bottom
U$45  [##CS##9]  80.52,40.39 90 top
U$46  [##SAFE##15]  72.9,11.18 90 top
U$47  [#3V3#6]  80.52,10.79 90 top
U$48  [#3V3#6]  77.98,39.75 90 top
U$49  [#5V#1]  75.44,40.26 90 top
U$50  [#GND#0]  77.98,10.79 90 top
U$51  [#GND#0]  72.9,39.75 90 top
U$52  [#INT#16]  75.44,10.54 90 top
U$53  [#PPS#13]  67.82,10.67 90 top
U$54  [#RX#SDI#10]  83.06,38.61 90 top
U$55  [#SCK#12]  88.14,39.88 90 top
U$56  [#SCL#18]  85.6,10.67 90 top
U$57  [#SDA#17]  83.06,10.79 90 top
U$58  [#TX#SDO#11]  85.6,38.23 90 top
U$59  [L1#L28]  92.08,37.97 0 top
U$60  [ANT8]  92.46,26.92 0 top
U$61  [NEO#M9N20]  73.91,22.48 0 bottom
U$62  [U#BLOX19]  73.66,24.51 0 bottom
U$63  [#SPI#22]  80.39,16.76 0 bottom
U$64  [##CS##6]  80.52,40.39 270 bottom
U$65  [##RST##12]  70.36,10.79 270 bottom
U$66  [##RST##2]  70.36,10.79 90 top
U$67  [##SAFE##11]  72.9,11.18 270 bottom
U$68  [#I2C#3]  58.93,31.12 0 bottom
U$69  [#INT#10]  75.44,10.54 270 bottom
U$70  [#PPS#0]  91.57,16.51 0 bottom
U$71  [#PPS#13]  67.82,10.67 270 bottom
U$72  [#PWR#1]  91.82,18.8 0 bottom
U$73  [#RX#SDI#4]  83.06,38.61 270 bottom
U$74  [#SCK#3]  88.14,39.88 270 bottom
U$75  [#SCL#8]  85.6,10.67 270 bottom
U$76  [#SDA#9]  83.06,10.79 270 bottom
U$77  [#GND#0]  72.9,39.75 270 bottom
U$78  [#3V3#6]  77.98,39.75 270 bottom
U$79  [#3V3#6]  80.52,10.79 270 bottom
U$80  [#GND#0]  77.98,10.79 270 bottom
U$81  [#5V#1]  75.44,40.26 270 bottom
U$82  [#TX#SDO#5]  85.6,38.23 270 bottom
U$83  [PPS7]  89.79,14.35 90 top
U$84  [PWR6]  92.2,14.35 90 top
U$85  [QWIIC_4MM]  103.12,18.03 0 top
U$86  [NEO_GPS_BOARD_SILK_FINAL#03#JPG]  116.08,18.29 0 bottom
U$87  [##CS##9]  127.51,40.39 90 top
U$88  [##SAFE##15]  119.89,11.18 90 top
U$89  [#3V3#6]  127.51,10.79 90 top
U$90  [#3V3#6]  124.97,39.75 90 top
U$91  [#5V#1]  122.43,40.26 90 top
U$92  [#GND#0]  124.97,10.79 90 top
U$93  [#GND#0]  119.89,39.75 90 top
U$94  [#INT#16]  122.43,10.54 90 top
U$95  [#PPS#13]  114.81,10.67 90 top
U$96  [#RX#SDI#10]  130.05,38.61 90 top
U$97  [#SCK#12]  135.13,39.88 90 top
U$98  [#SCL#18]  132.59,10.67 90 top
U$99  [#SDA#17]  130.05,10.79 90 top
U$100  [#TX#SDO#11]  132.59,38.23 90 top
U$101  [L1#L28]  139.06,37.97 0 top
U$102  [ANT8]  139.45,26.92 0 top
U$103  [NEO#M9N20]  120.9,22.48 0 bottom
U$104  [U#BLOX19]  120.65,24.51 0 bottom
U$105  [#SPI#22]  127.38,16.76 0 bottom
U$106  [##CS##6]  127.51,40.39 270 bottom
U$107  [##RST##12]  117.35,10.79 270 bottom
U$108  [##RST##2]  117.35,10.79 90 top
U$109  [##SAFE##11]  119.89,11.18 270 bottom
U$110  [#I2C#3]  105.92,31.12 0 bottom
U$111  [#INT#10]  122.43,10.54 270 bottom
U$112  [#PPS#0]  138.56,16.51 0 bottom
U$113  [#PPS#13]  114.81,10.67 270 bottom
U$114  [#PWR#1]  138.81,18.8 0 bottom
U$115  [#RX#SDI#4]  130.05,38.61 270 bottom
U$116  [#SCK#3]  135.13,39.88 270 bottom
U$117  [#SCL#8]  132.59,10.67 270 bottom
U$118  [#SDA#9]  130.05,10.79 270 bottom
U$119  [#GND#0]  119.89,39.75 270 bottom
U$120  [#3V3#6]  124.97,39.75 270 bottom
U$121  [#3V3#6]  127.51,10.79 270 bottom
U$122  [#GND#0]  124.97,10.79 270 bottom
U$123  [#5V#1]  122.43,40.26 270 bottom
U$124  [#TX#SDO#5]  132.59,38.23 270 bottom
U$125  [PPS7]  136.78,14.35 90 top
U$126  [PWR6]  139.19,14.35 90 top
U$127  [QWIIC_4MM]  9.14,57.89 0 top
U$128  [NEO_GPS_BOARD_SILK_FINAL#03#JPG]  22.1,58.14 0 bottom
U$129  [##CS##9]  33.53,80.24 90 top
U$130  [##SAFE##15]  25.91,51.03 90 top
U$131  [#3V3#6]  33.53,50.65 90 top
U$132  [#3V3#6]  30.99,79.6 90 top
U$133  [#5V#1]  28.45,80.11 90 top
U$134  [#GND#0]  30.99,50.65 90 top
U$135  [#GND#0]  25.91,79.6 90 top
U$136  [#INT#16]  28.45,50.39 90 top
U$137  [#PPS#13]  20.83,50.52 90 top
U$138  [#RX#SDI#10]  36.07,78.46 90 top
U$139  [#SCK#12]  41.15,79.73 90 top
U$140  [#SCL#18]  38.61,50.52 90 top
U$141  [#SDA#17]  36.07,50.65 90 top
U$142  [#TX#SDO#11]  38.61,78.08 90 top
U$143  [L1#L28]  45.08,77.83 0 top
U$144  [ANT8]  45.47,66.78 0 top
U$145  [NEO#M9N20]  26.92,62.33 0 bottom
U$146  [U#BLOX19]  26.67,64.36 0 bottom
U$147  [#SPI#22]  33.4,56.62 0 bottom
U$148  [##CS##6]  33.53,80.24 270 bottom
U$149  [##RST##12]  23.37,50.65 270 bottom
U$150  [##RST##2]  23.37,50.65 90 top
U$151  [##SAFE##11]  25.91,51.03 270 bottom
U$152  [#I2C#3]  11.94,70.97 0 bottom
U$153  [#INT#10]  28.45,50.39 270 bottom
U$154  [#PPS#0]  44.58,56.36 0 bottom
U$155  [#PPS#13]  20.83,50.52 270 bottom
U$156  [#PWR#1]  44.83,58.65 0 bottom
U$157  [#RX#SDI#4]  36.07,78.46 270 bottom
U$158  [#SCK#3]  41.15,79.73 270 bottom
U$159  [#SCL#8]  38.61,50.52 270 bottom
U$160  [#SDA#9]  36.07,50.65 270 bottom
U$161  [#GND#0]  25.91,79.6 270 bottom
U$162  [#3V3#6]  30.99,79.6 270 bottom
U$163  [#3V3#6]  33.53,50.65 270 bottom
U$164  [#GND#0]  30.99,50.65 270 bottom
U$165  [#5V#1]  28.45,80.11 270 bottom
U$166  [#TX#SDO#5]  38.61,78.08 270 bottom
U$167  [PPS7]  42.8,54.2 90 top
U$168  [PWR6]  45.21,54.2 90 top
U$169  [QWIIC_4MM]  56.13,57.89 0 top
U$170  [NEO_GPS_BOARD_SILK_FINAL#03#JPG]  69.09,58.14 0 bottom
U$171  [##CS##9]  80.52,80.24 90 top
U$172  [##SAFE##15]  72.9,51.03 90 top
U$173  [#3V3#6]  80.52,50.65 90 top
U$174  [#3V3#6]  77.98,79.6 90 top
U$175  [#5V#1]  75.44,80.11 90 top
U$176  [#GND#0]  77.98,50.65 90 top
U$177  [#GND#0]  72.9,79.6 90 top
U$178  [#INT#16]  75.44,50.39 90 top
U$179  [#PPS#13]  67.82,50.52 90 top
U$180  [#RX#SDI#10]  83.06,78.46 90 top
U$181  [#SCK#12]  88.14,79.73 90 top
U$182  [#SCL#18]  85.6,50.52 90 top
U$183  [#SDA#17]  83.06,50.65 90 top
U$184  [#TX#SDO#11]  85.6,78.08 90 top
U$185  [L1#L28]  92.08,77.83 0 top
U$186  [ANT8]  92.46,66.78 0 top
U$187  [NEO#M9N20]  73.91,62.33 0 bottom
U$188  [U#BLOX19]  73.66,64.36 0 bottom
U$189  [#SPI#22]  80.39,56.62 0 bottom
U$190  [##CS##6]  80.52,80.24 270 bottom
U$191  [##RST##12]  70.36,50.65 270 bottom
U$192  [##RST##2]  70.36,50.65 90 top
U$193  [##SAFE##11]  72.9,51.03 270 bottom
U$194  [#I2C#3]  58.93,70.97 0 bottom
U$195  [#INT#10]  75.44,50.39 270 bottom
U$196  [#PPS#0]  91.57,56.36 0 bottom
U$197  [#PPS#13]  67.82,50.52 270 bottom
U$198  [#PWR#1]  91.82,58.65 0 bottom
U$199  [#RX#SDI#4]  83.06,78.46 270 bottom
U$200  [#SCK#3]  88.14,79.73 270 bottom
U$201  [#SCL#8]  85.6,50.52 270 bottom
U$202  [#SDA#9]  83.06,50.65 270 bottom
U$203  [#GND#0]  72.9,79.6 270 bottom
U$204  [#3V3#6]  77.98,79.6 270 bottom
U$205  [#3V3#6]  80.52,50.65 270 bottom
U$206  [#GND#0]  77.98,50.65 270 bottom
U$207  [#5V#1]  75.44,80.11 270 bottom
U$208  [#TX#SDO#5]  85.6,78.08 270 bottom
U$209  [PPS7]  89.79,54.2 90 top
U$210  [PWR6]  92.2,54.2 90 top
U$211  [QWIIC_4MM]  103.12,57.89 0 top
U$212  [NEO_GPS_BOARD_SILK_FINAL#03#JPG]  116.08,58.14 0 bottom
U$213  [##CS##9]  127.51,80.24 90 top
U$214  [##SAFE##15]  119.89,51.03 90 top
U$215  [#3V3#6]  127.51,50.65 90 top
U$216  [#3V3#6]  124.97,79.6 90 top
U$217  [#5V#1]  122.43,80.11 90 top
U$218  [#GND#0]  124.97,50.65 90 top
U$219  [#GND#0]  119.89,79.6 90 top
U$220  [#INT#16]  122.43,50.39 90 top
U$221  [#PPS#13]  114.81,50.52 90 top
U$222  [#RX#SDI#10]  130.05,78.46 90 top
U$223  [#SCK#12]  135.13,79.73 90 top
U$224  [#SCL#18]  132.59,50.52 90 top
U$225  [#SDA#17]  130.05,50.65 90 top
U$226  [#TX#SDO#11]  132.59,78.08 90 top
U$227  [L1#L28]  139.06,77.83 0 top
U$228  [ANT8]  139.45,66.78 0 top
U$229  [NEO#M9N20]  120.9,62.33 0 bottom
U$230  [U#BLOX19]  120.65,64.36 0 bottom
U$231  [#SPI#22]  127.38,56.62 0 bottom
U$232  [##CS##6]  127.51,80.24 270 bottom
U$233  [##RST##12]  117.35,50.65 270 bottom
U$234  [##RST##2]  117.35,50.65 90 top
U$235  [##SAFE##11]  119.89,51.03 270 bottom
U$236  [#I2C#3]  105.92,70.97 0 bottom
U$237  [#INT#10]  122.43,50.39 270 bottom
U$238  [#PPS#0]  138.56,56.36 0 bottom
U$239  [#PPS#13]  114.81,50.52 270 bottom
U$240  [#PWR#1]  138.81,58.65 0 bottom
U$241  [#RX#SDI#4]  130.05,78.46 270 bottom
U$242  [#SCK#3]  135.13,79.73 270 bottom
U$243  [#SCL#8]  132.59,50.52 270 bottom
U$244  [#SDA#9]  130.05,50.65 270 bottom
U$245  [#GND#0]  119.89,79.6 270 bottom
U$246  [#3V3#6]  124.97,79.6 270 bottom
U$247  [#3V3#6]  127.51,50.65 270 bottom
U$248  [#GND#0]  124.97,50.65 270 bottom
U$249  [#5V#1]  122.43,80.11 270 bottom
U$250  [#TX#SDO#5]  132.59,78.08 270 bottom
U$251  [PPS7]  136.78,54.2 90 top
U$252  [PWR6]  139.19,54.2 90 top

## Library data of the parts
B1-B6 = SparkFun-Batteries; PROD_ID: BATT-14267
C1 C10 C15 C20 C25 C30 = SparkFun-Capacitors; PROD_ID: CAP-15063
C2-C4 C6 C7 C9 C11 C12 C14 C16 C17 C19 C21 C22 C24 C26 C27 C29 = SparkFun-Capacitors; PROD_ID: CAP-00868
C5 C8 C13 C18 C23 C28 = SparkFun-Capacitors; PROD_ID: CAP-00810
D1 D2 D5 D7 D9 D11 = SparkFun-DiscreteSemi; PROD_ID: DIO-10955
D3 D4 D6 D8 D10 D12 = SparkFun-IC-Power; PROD_ID: DIO-14084
E1-E6 = SparkFun-RF; PROD_ID: CONN-15100
E$1-E$4 LOGO1-LOGO12 U$14 U$43 U$85 U$127 U$169 U$211 = SparkFun-Aesthetics
E$5 E$6 = SparkFun-Retired
FB1-FB6 = SparkFun-Coils; MFG_PART: BLM15HB121SN1D; PROD_ID: NDUC-14206
J1 J5 J8 J9 J13 J14 J18 J19 J23 J24 J28 J29 JP11 JP15 JP23 JP34 JP44 JP54 TP1-TP6 = SparkFun-Connectors
J2 J4 J6 J7 J11 J12 J16 J17 J21 J22 J26 J27 = SparkFun-Connectors; PROD_ID: CONN-13694
J3 J10 J15 J20 J25 J30 = SparkFun-Connectors; PROD_ID: CONN-14122
JP1-JP4 JP7-JP10 JP12-JP14 JP16 JP18-JP22 JP24-JP27 JP29-JP33 JP35-JP38 JP40-JP43 JP45-JP48 JP50-JP53 JP55 JP61 JP71 JP81 JP91 JP101 = SparkFun
JP5 JP6 JP17 JP28 JP39 JP49 PPS PPS1-PPS5 PWR\ PWR\1-PWR\5 SPI SPI1-SPI5 = SparkFun-Jumpers
LED1 LED3 LED5 LED7 LED9 LED11 = SparkFun-LED; PROD_ID: DIO-08575
LED2 LED4 LED6 LED8 LED10 LED12 = SparkFun-LED; PROD_ID: DIO-00819
R1 R5 R11 R21 R22 R25 R37 R38 R41 R53 R54 R57 R69 R70 R73 R85 R86 R89 = SparkFun-Resistors; PROD_ID: RES-07856
R2-R4 R6 R17 R18 R23 R24 R33 R34 R39 R40 R49 R50 R55 R56 R65 R66 R71 R72 R81 R82 R87 R88 = SparkFun-Resistors; PROD_ID: RES-08270
R7 R8 R19 R20 R35 R36 R51 R52 R67 R68 R83 R84 = SparkFun-Resistors; PROD_ID: RES-08272
R9 R10 R26 R27 R42 R43 R58 R59 R74 R75 R90 R91 = SparkFun-Resistors; PROD_ID: RES-09334
R12 R13 R29 R30 R45 R46 R61 R62 R77 R78 R93 R94 = SparkFun-Resistors; PROD_ID: RES-12083
R14 R32 R48 R64 R80 R96 = SparkFun-Resistors; PROD_ID: RES-14883
R15 R28 R44 R60 R76 R92 = SparkFun-Resistors; PROD_ID: RES-07828
R16 R31 R47 R63 R79 R95 = SparkFun-Resistors; PROD_ID: RES-14241
U1 U4 U6 U8 U10 U12 = SparkFun-GPS; PROD_ID: IC-14651
U2 U3 U5 U7 U9 U11 = SparkFun-IC-Power; PROD_ID: VREG-12457
U$1-U$13 U$15 U$16 U$18-U$20 U$23-U$25 U$38-U$42 U$45-U$63 U$77-U$81 U$83 U$84 U$87-U$105 U$119-U$123 U$125 U$126 U$129-U$147 U$161-U$165 U$167 U$168 U$171-U$189 U$203-U$207 U$209 U$210 U$213-U$231 U$245-U$249 U$251 U$252 = gps
U$17 U$22 U$26-U$37 U$64-U$76 U$82 U$106-U$118 U$124 U$148-U$160 U$166 U$190-U$202 U$208 U$232-U$244 U$250 = gps2
U$21 U$44 U$86 U$128 U$170 U$212 = NEO_GPS_board_silk_FINAL#03#jpg

## Nets
3.3V [3.3V]: C4.1 C5.2 D2.A J1.3 J2.2 J4.2 J5.2 JP5.2 PWR\.2 R15.2 R16.2 U1.7 U1.23 U2.5
3.3V1 [3.3V]: C7.1 C8.2 D1.A J6.2 J7.2 J8.3 J9.2 JP6.2 PWR\1.2 R28.2 R31.2 U3.5 U4.7 U4.23
3.3V2 [3.3V]: C12.1 C13.2 D5.A J11.2 J12.2 J13.3 J14.2 JP17.2 PWR\2.2 R44.2 R47.2 U5.5 U6.7 U6.23
3.3V3 [3.3V]: C17.1 C18.2 D7.A J16.2 J17.2 J18.3 J19.2 JP28.2 PWR\3.2 R60.2 R63.2 U7.5 U8.7 U8.23
3.3V4 [3.3V]: C22.1 C23.2 D9.A J21.2 J22.2 J23.3 J24.2 JP39.2 PWR\4.2 R76.2 R79.2 U9.5 U10.7 U10.23
3.3V5 [3.3V]: C27.1 C28.2 D11.A J26.2 J27.2 J28.3 J29.2 JP49.2 PWR\5.2 R92.2 R95.2 U11.5 U12.7 U12.23
5V: C6.1 D3.5 J1.2 J3.VBUS1 J3.VBUS2 U2.1 U2.3
5V1: C9.1 D4.5 J8.2 J10.VBUS1 J10.VBUS2 U3.1 U3.3
5V2: C14.1 D6.5 J13.2 J15.VBUS1 J15.VBUS2 U5.1 U5.3
5V3: C19.1 D8.5 J18.2 J20.VBUS1 J20.VBUS2 U7.1 U7.3
5V4: C24.1 D10.5 J23.2 J25.VBUS1 J25.VBUS2 U9.1 U9.3
5V5: C29.1 D12.5 J28.2 J30.VBUS1 J30.VBUS2 U11.1 U11.3
!RESET: JP15.3 U1.8
!RESET1: JP11.3 U4.8
!RESET2: JP23.3 U6.8
!RESET3: JP34.3 U8.8
!RESET4: JP44.3 U10.8
!RESET5: JP54.3 U12.8
!SAFE: JP15.2 U1.1
!SAFE1: JP11.2 U4.1
!SAFE2: JP23.2 U6.1
!SAFE3: JP34.2 U8.1
!SAFE4: JP44.2 U10.1
!SAFE5: JP54.2 U12.1
D+: D3.4 R9.1
D+1: D4.4 R26.1
D+2: D6.4 R42.1
D+3: D8.4 R58.1
D+4: D10.4 R74.1
D+5: D12.4 R90.1
D-: D3.6 R10.1
D-1: D4.6 R27.1
D-2: D6.6 R43.1
D-3: D8.6 R59.1
D-4: D10.6 R75.1
D-5: D12.6 R91.1
D_SEL: R16.1 SPI.2 U1.2
D_SEL1: R31.1 SPI1.2 U4.2
D_SEL2: R47.1 SPI2.2 U6.2
D_SEL3: R63.1 SPI3.2 U8.2
D_SEL4: R79.1 SPI4.2 U10.2
D_SEL5: R95.1 SPI5.2 U12.2
GND: B1.- C1.2 C3.2 C4.2 C5.1 C6.2 D3.2 E1.GND@0 E1.GND@1 J1.1 J2.1 J3.GND J3.GND2 J4.1 J5.1 LED1.C LED2.C R12.1 R13.1 R15.1 SPI.1 U1.10 U1.12 U1.13 U1.24 U2.2
GND1: B2.- C2.2 C7.2 C8.1 C9.2 C10.2 D4.2 E2.GND@0 E2.GND@1 J6.1 J7.1 J8.1 J9.1 J10.GND J10.GND2 LED3.C LED4.C R28.1 R29.1 R30.1 SPI1.1 U3.2 U4.10 U4.12 U4.13 U4.24
GND2: B3.- C11.2 C12.2 C13.1 C14.2 C15.2 D6.2 E3.GND@0 E3.GND@1 J11.1 J12.1 J13.1 J14.1 J15.GND J15.GND2 LED5.C LED6.C R44.1 R45.1 R46.1 SPI2.1 U5.2 U6.10 U6.12 U6.13 U6.24
GND3: B4.- C16.2 C17.2 C18.1 C19.2 C20.2 D8.2 E4.GND@0 E4.GND@1 J16.1 J17.1 J18.1 J19.1 J20.GND J20.GND2 LED7.C LED8.C R60.1 R61.1 R62.1 SPI3.1 U7.2 U8.10 U8.12 U8.13 U8.24
GND4: B5.- C21.2 C22.2 C23.1 C24.2 C25.2 D10.2 E5.GND@0 E5.GND@1 J21.1 J22.1 J23.1 J24.1 J25.GND J25.GND2 LED9.C LED10.C R76.1 R77.1 R78.1 SPI4.1 U9.2 U10.10 U10.12 U10.13 U10.24
GND5: B6.- C26.2 C27.2 C28.1 C29.2 C30.2 D12.2 E6.GND@0 E6.GND@1 J26.1 J27.1 J28.1 J29.1 J30.GND J30.GND2 LED11.C LED12.C R92.1 R93.1 R94.1 SPI5.1 U11.2 U12.10 U12.12 U12.13 U12.24
GPS_ANT1 [Antenna]: E1.SIG FB1.1 U1.11
GPS_ANT2 [Antenna]: E2.SIG FB2.1 U4.11
GPS_ANT3 [Antenna]: E3.SIG FB3.1 U6.11
GPS_ANT4 [Antenna]: E4.SIG FB4.1 U8.11
GPS_ANT5 [Antenna]: E5.SIG FB5.1 U10.11
GPS_ANT6 [Antenna]: E6.SIG FB6.1 U12.11
INT: JP15.1 U1.4
INT1: JP11.1 U4.4
INT2: JP23.1 U6.4
INT3: JP34.1 U8.4
INT4: JP44.1 U10.4
INT5: JP54.1 U12.4
N$1: PWR\.1 R1.2
N$2: LED1.A R11.1
N$3: C1.1 FB1.2 R14.1
N$4: PPS.1 R11.2
N$5: JP5.1 R8.2
N$6: D2.C R5.2
N$7: J3.B5 R12.2
N$8: JP5.3 R7.2
N$9: J3.A5 R13.2
N$10: LED2.A R1.1
N$11: R9.2 U1.6
N$12: R10.2 U1.5
N$13: JP6.1 R20.2
N$14: JP6.3 R19.2
N$15: LED3.A R22.1
N$16: PPS1.1 R22.2
N$17: D1.C R21.2
N$18: LED4.A R25.1
N$19: R26.2 U4.6
N$20: R27.2 U4.5
N$21: PWR\1.1 R25.2
N$22: J10.B5 R29.2
N$23: J10.A5 R30.2
N$24: C10.1 FB2.2 R32.1
N$25: JP17.1 R36.2
N$26: JP17.3 R35.2
N$27: LED5.A R38.1
N$28: PPS2.1 R38.2
N$29: D5.C R37.2
N$30: LED6.A R41.1
N$31: R42.2 U6.6
N$32: R43.2 U6.5
N$33: PWR\2.1 R41.2
N$34: J15.B5 R45.2
N$35: J15.A5 R46.2
N$36: C15.1 FB3.2 R48.1
N$37: JP28.1 R52.2
N$38: JP28.3 R51.2
N$39: LED7.A R54.1
N$40: PPS3.1 R54.2
N$41: D7.C R53.2
N$42: LED8.A R57.1
N$43: R58.2 U8.6
N$44: R59.2 U8.5
N$45: PWR\3.1 R57.2
N$46: J20.B5 R61.2
N$47: J20.A5 R62.2
N$48: C20.1 FB4.2 R64.1
N$49: JP39.1 R68.2
N$50: JP39.3 R67.2
N$51: LED9.A R70.1
N$52: PPS4.1 R70.2
N$53: D9.C R69.2
N$54: LED10.A R73.1
N$55: R74.2 U10.6
N$56: R75.2 U10.5
N$57: PWR\4.1 R73.2
N$58: J25.B5 R77.2
N$59: J25.A5 R78.2
N$60: C25.1 FB5.2 R80.1
N$61: JP49.1 R84.2
N$62: JP49.3 R83.2
N$63: LED11.A R86.1
N$64: PPS5.1 R86.2
N$65: D11.C R85.2
N$66: LED12.A R89.1
N$67: R90.2 U12.6
N$68: R91.2 U12.5
N$69: PWR\5.1 R89.2
N$70: J30.B5 R93.2
N$71: J30.A5 R94.2
N$72: C30.1 FB6.2 R96.1
PPS: JP15.4 PPS.2 U1.3
PPS1: JP11.4 PPS1.2 U4.3
PPS2: JP23.4 PPS2.2 U6.3
PPS3: JP34.4 PPS3.2 U8.3
PPS4: JP44.4 PPS4.2 U10.3
PPS5: JP54.4 PPS5.2 U12.3
RXI/SDI: J1.5 R6.2
RXI/SDI1: J8.5 R18.2
RXI/SDI2: J13.5 R34.2
RXI/SDI3: J18.5 R50.2
RXI/SDI4: J23.5 R66.2
RXI/SDI5: J28.5 R82.2
RXLV: R6.1 U1.21
RXLV1: R18.1 U4.21
RXLV2: R34.1 U6.21
RXLV3: R50.1 U8.21
RXLV4: R66.1 U10.21
RXLV5: R82.1 U12.21
SCL/SCK: J1.7 J2.4 J4.4 J5.4 R4.2 R7.1
SCL/SCK1: J6.4 J7.4 J8.7 J9.4 R19.1 R24.2
SCL/SCK2: J11.4 J12.4 J13.7 J14.4 R35.1 R40.2
SCL/SCK3: J16.4 J17.4 J18.7 J19.4 R51.1 R56.2
SCL/SCK4: J21.4 J22.4 J23.7 J24.4 R67.1 R72.2
SCL/SCK5: J26.4 J27.4 J28.7 J29.4 R83.1 R88.2
SCL_LV: R4.1 U1.19
SCL_LV1: R24.1 U4.19
SCL_LV2: R40.1 U6.19
SCL_LV3: R56.1 U8.19
SCL_LV4: R72.1 U10.19
SCL_LV5: R88.1 U12.19
SDA/!CS: J1.4 J2.3 J4.3 J5.3 R2.2 R8.1
SDA/!CS1: J6.3 J7.3 J8.4 J9.3 R20.1 R23.2
SDA/!CS2: J11.3 J12.3 J13.4 J14.3 R36.1 R39.2
SDA/!CS3: J16.3 J17.3 J18.4 J19.3 R52.1 R55.2
SDA/!CS4: J21.3 J22.3 J23.4 J24.3 R68.1 R71.2
SDA/!CS5: J26.3 J27.3 J28.4 J29.3 R84.1 R87.2
SDA_LV: R2.1 U1.18
SDA_LV1: R23.1 U4.18
SDA_LV2: R39.1 U6.18
SDA_LV3: R55.1 U8.18
SDA_LV4: R71.1 U10.18
SDA_LV5: R87.1 U12.18
SHLD: J3.SHLD1 J3.SHLD2 J3.SHLD3 J3.SHLD4
SHLD1: J10.SHLD1 J10.SHLD2 J10.SHLD3 J10.SHLD4
SHLD2: J15.SHLD1 J15.SHLD2 J15.SHLD3 J15.SHLD4
SHLD3: J20.SHLD1 J20.SHLD2 J20.SHLD3 J20.SHLD4
SHLD4: J25.SHLD1 J25.SHLD2 J25.SHLD3 J25.SHLD4
SHLD5: J30.SHLD1 J30.SHLD2 J30.SHLD3 J30.SHLD4
TXLV: R3.1 U1.20
TXLV1: R17.1 U4.20
TXLV2: R33.1 U6.20
TXLV3: R49.1 U8.20
TXLV4: R65.1 U10.20
TXLV5: R81.1 U12.20
TXO/SDO: J1.6 R3.2
TXO/SDO1: J8.6 R17.2
TXO/SDO2: J13.6 R33.2
TXO/SDO3: J18.6 R49.2
TXO/SDO4: J23.6 R65.2
TXO/SDO5: J28.6 R81.2
USB_D+: D3.3 J3.A6 J3.B6
USB_D+1: D4.3 J10.A6 J10.B6
USB_D+2: D6.3 J15.A6 J15.B6
USB_D+3: D8.3 J20.A6 J20.B6
USB_D+4: D10.3 J25.A6 J25.B6
USB_D+5: D12.3 J30.A6 J30.B6
USB_D-: D3.1 J3.A7 J3.B7
USB_D-1: D4.1 J10.A7 J10.B7
USB_D-2: D6.1 J15.A7 J15.B7
USB_D-3: D8.1 J20.A7 J20.B7
USB_D-4: D10.1 J25.A7 J25.B7
USB_D-5: D12.1 J30.A7 J30.B7
V_BATT: B1.+ C3.1 R5.1 TP1.P$1 U1.22
V_BATT1: B2.+ C2.1 R21.1 TP2.P$1 U4.22
V_BATT2: B3.+ C11.1 R37.1 TP3.P$1 U6.22
V_BATT3: B4.+ C16.1 R53.1 TP4.P$1 U8.22
V_BATT4: B5.+ C21.1 R69.1 TP5.P$1 U10.22
V_BATT5: B6.+ C26.1 R85.1 TP6.P$1 U12.22
VCC_RF: R14.2 U1.9
VCC_RF1: R32.2 U4.9
VCC_RF2: R48.2 U6.9
VCC_RF3: R64.2 U8.9
VCC_RF4: R80.2 U10.9
VCC_RF5: R96.2 U12.9

## Tracks (layer width: path | path; a pad name or v marks a point on that pad's centre or on a via)
3.3V  (via drill 0.3, 0.51)
  Top 0.152: v40.39,18.8 40,18.41 v39.06,18.41
  Top 0.508: U2.5 36.52,21.86 C4.1 34.42,22.69 U1.7 | v36.58,22.45 36.62,22.41 U2.5 | J4.2 43.09,21.95 43.69,22.55 v43.69,22.58 | v37.34,20.02 37.34,20.29 36.62,21.01 U2.5 | 32.82,10.72 31.88,11.66 20.83,11.66 19.56,12.93 19.56,13.56 | 32.82,10.72 33.53,10.01 J5.2 | 19.56,14.96 19.56,16.74 20.01,17.19 U1.23 | v14.73,13.69 14.86,13.56 19.56,13.56 | D2.A 19.56,14.96 | R15.2 23.82,36.6 v23.88,36.55 | 32.82,10.72 33.1,11 35.61,11 v35.64,11.02 | 19.56,13.56 C5.2 | 19.56,14.96 19.56,13.56 | R16.2 36.7,16.57 v36.7,15.34 | J2.2 12.57,22.95 v13.21,23.59
  Bottom 0.152: v39.06,18.41 37.59,18.41 37.46,18.54 | v40.39,18.8 40.89,18.8 40.92,18.77 PWR\.2
  Bottom 0.508: v43.69,22.58 43.56,22.45 v36.58,22.45 | v14.73,13.69 13.21,15.21 v13.21,23.59 11.94,24.86 11.94,27.43 | v37.34,20.02 37.46,19.89 37.46,18.54 37.46,16.1 v36.7,15.34 36.7,12.06 35.66,11.02 v35.64,11.02 | JP5.2 11.94,27.43 | 11.94,27.43 12.83,27.43 21.95,36.55 v23.87,36.55 v23.88,36.55 24.64,37.31 29.95,37.31 30.99,38.35 J1.3
3.3V1  (via drill 0.3, 0.51)
  Top 0.152: v87.38,18.8 87,18.41 v86.06,18.41
  Top 0.508: U3.5 83.51,21.86 C7.1 81.41,22.69 U4.7 | v83.57,22.45 83.61,22.41 U3.5 | J7.2 90.08,21.95 90.68,22.55 v90.68,22.58 | v84.33,20.02 84.33,20.29 83.61,21.01 U3.5 | 79.81,10.72 78.87,11.66 67.82,11.66 66.55,12.93 66.55,13.56 | 79.81,10.72 80.52,10.01 J9.2 | 66.55,14.96 66.55,16.74 67,17.19 U4.23 | v61.72,13.69 61.85,13.56 66.55,13.56 | D1.A 66.55,14.96 | R28.2 70.81,36.6 v70.87,36.55 | 79.81,10.72 80.09,11 82.6,11 v82.63,11.02 | 66.55,13.56 C8.2 | 66.55,14.96 66.55,13.56 | R31.2 83.69,16.57 v83.69,15.34 | J6.2 59.56,22.95 v60.2,23.59
  Bottom 0.152: v86.06,18.41 84.58,18.41 84.45,18.54 | v87.38,18.8 87.88,18.8 87.91,18.77 PWR\1.2
  Bottom 0.508: v90.68,22.58 90.55,22.45 v83.57,22.45 | v61.72,13.69 60.2,15.21 v60.2,23.59 58.93,24.86 58.93,27.43 | v84.33,20.02 84.45,19.89 84.45,18.54 84.45,16.1 v83.69,15.34 83.69,12.06 82.65,11.02 v82.63,11.02 | JP6.2 58.93,27.43 | 58.93,27.43 59.82,27.43 68.94,36.55 v70.86,36.55 v70.87,36.55 71.63,37.31 76.94,37.31 77.98,38.35 J8.3
3.3V2  (via drill 0.3, 0.51)
  Top 0.152: v134.37,18.8 133.98,18.41 v133.04,18.41
  Top 0.508: U5.5 130.5,21.86 C12.1 128.4,22.69 U6.7 | v130.56,22.45 130.6,22.41 U5.5 | J12.2 137.07,21.95 137.67,22.55 v137.67,22.58 | v131.32,20.02 131.32,20.29 130.6,21.01 U5.5 | 126.8,10.72 125.86,11.66 114.81,11.66 113.54,12.93 113.54,13.56 | 126.8,10.72 127.51,10.01 J14.2 | 113.54,14.96 113.54,16.74 113.99,17.19 U6.23 | v108.71,13.69 108.84,13.56 113.54,13.56 | D5.A 113.54,14.96 | R44.2 117.81,36.6 v117.86,36.55 | 126.8,10.72 127.08,11 129.59,11 v129.62,11.02 | 113.54,13.56 C13.2 | 113.54,14.96 113.54,13.56 | R47.2 130.68,16.57 v130.68,15.34 | J11.2 106.55,22.95 v107.19,23.59
  Bottom 0.152: v133.04,18.41 131.57,18.41 131.44,18.54 | v134.37,18.8 134.87,18.8 134.9,18.77 PWR\2.2
  Bottom 0.508: v137.67,22.58 137.54,22.45 v130.56,22.45 | v108.71,13.69 107.19,15.21 v107.19,23.59 105.92,24.86 105.92,27.43 | v131.32,20.02 131.44,19.89 131.44,18.54 131.44,16.1 v130.68,15.34 130.68,12.06 129.64,11.02 v129.62,11.02 | JP17.2 105.92,27.43 | 105.92,27.43 106.81,27.43 115.93,36.55 v117.85,36.55 v117.86,36.55 118.62,37.31 123.93,37.31 124.97,38.35 J13.3
3.3V3  (via drill 0.3, 0.51)
  Top 0.152: v40.39,58.65 40,58.27 v39.06,58.27
  Top 0.508: U7.5 36.52,61.71 C17.1 34.42,62.54 U8.7 | v36.58,62.31 36.62,62.26 U7.5 | J17.2 43.09,61.81 43.69,62.41 v43.69,62.43 | v37.34,59.87 37.34,60.15 36.62,60.86 U7.5 | 32.82,50.57 31.88,51.51 20.83,51.51 19.56,52.78 19.56,53.42 | 32.82,50.57 33.53,49.86 J19.2 | 19.56,54.81 19.56,56.59 20.01,57.04 U8.23 | v14.73,53.54 14.86,53.42 19.56,53.42 | D7.A 19.56,54.81 | R60.2 23.82,76.45 v23.88,76.4 | 32.82,50.57 33.1,50.85 35.61,50.85 v35.64,50.88 | 19.56,53.42 C18.2 | 19.56,54.81 19.56,53.42 | R63.2 36.7,56.42 v36.7,55.19 | J16.2 12.57,62.81 v13.21,63.44
  Bottom 0.152: v39.06,58.27 37.59,58.27 37.46,58.39 | v40.39,58.65 40.89,58.65 40.92,58.62 PWR\3.2
  Bottom 0.508: v43.69,62.43 43.56,62.31 v36.58,62.31 | v14.73,53.54 13.21,55.07 v13.21,63.44 11.94,64.71 11.94,67.28 | v37.34,59.87 37.46,59.74 37.46,58.39 37.46,55.96 v36.7,55.19 36.7,51.92 35.66,50.88 v35.64,50.88 | JP28.2 11.94,67.28 | 11.94,67.28 12.83,67.28 21.95,76.4 v23.87,76.4 v23.88,76.4 24.64,77.17 29.95,77.17 30.99,78.21 J18.3
3.3V4  (via drill 0.3, 0.51)
  Top 0.152: v87.38,58.65 87,58.27 v86.06,58.27
  Top 0.508: U9.5 83.51,61.71 C22.1 81.41,62.54 U10.7 | v83.57,62.31 83.61,62.26 U9.5 | J22.2 90.08,61.81 90.68,62.41 v90.68,62.43 | v84.33,59.87 84.33,60.15 83.61,60.86 U9.5 | 79.81,50.57 78.87,51.51 67.82,51.51 66.55,52.78 66.55,53.42 | 79.81,50.57 80.52,49.86 J24.2 | 66.55,54.81 66.55,56.59 67,57.04 U10.23 | v61.72,53.54 61.85,53.42 66.55,53.42 | D9.A 66.55,54.81 | R76.2 70.81,76.45 v70.87,76.4 | 79.81,50.57 80.09,50.85 82.6,50.85 v82.63,50.88 | 66.55,53.42 C23.2 | 66.55,54.81 66.55,53.42 | R79.2 83.69,56.42 v83.69,55.19 | J21.2 59.56,62.81 v60.2,63.44
  Bottom 0.152: v86.06,58.27 84.58,58.27 84.45,58.39 | v87.38,58.65 87.88,58.65 87.91,58.62 PWR\4.2
  Bottom 0.508: v90.68,62.43 90.55,62.31 v83.57,62.31 | v61.72,53.54 60.2,55.07 v60.2,63.44 58.93,64.71 58.93,67.28 | v84.33,59.87 84.45,59.74 84.45,58.39 84.45,55.96 v83.69,55.19 83.69,51.92 82.65,50.88 v82.63,50.88 | JP39.2 58.93,67.28 | 58.93,67.28 59.82,67.28 68.94,76.4 v70.86,76.4 v70.87,76.4 71.63,77.17 76.94,77.17 77.98,78.21 J23.3
3.3V5  (via drill 0.3, 0.51)
  Top 0.152: v134.37,58.65 133.98,58.27 v133.04,58.27
  Top 0.508: U11.5 130.5,61.71 C27.1 128.4,62.54 U12.7 | v130.56,62.31 130.6,62.26 U11.5 | J27.2 137.07,61.81 137.67,62.41 v137.67,62.43 | v131.32,59.87 131.32,60.15 130.6,60.86 U11.5 | 126.8,50.57 125.86,51.51 114.81,51.51 113.54,52.78 113.54,53.42 | 126.8,50.57 127.51,49.86 J29.2 | 113.54,54.81 113.54,56.59 113.99,57.04 U12.23 | v108.71,53.54 108.84,53.42 113.54,53.42 | D11.A 113.54,54.81 | R92.2 117.81,76.45 v117.86,76.4 | 126.8,50.57 127.08,50.85 129.59,50.85 v129.62,50.88 | 113.54,53.42 C28.2 | 113.54,54.81 113.54,53.42 | R95.2 130.68,56.42 v130.68,55.19 | J26.2 106.55,62.81 v107.19,63.44
  Bottom 0.152: v133.04,58.27 131.57,58.27 131.44,58.39 | v134.37,58.65 134.87,58.65 134.9,58.62 PWR\5.2
  Bottom 0.508: v137.67,62.43 137.54,62.31 v130.56,62.31 | v108.71,53.54 107.19,55.07 v107.19,63.44 105.92,64.71 105.92,67.28 | v131.32,59.87 131.44,59.74 131.44,58.39 131.44,55.96 v130.68,55.19 130.68,51.92 129.64,50.88 v129.62,50.88 | JP49.2 105.92,67.28 | 105.92,67.28 106.81,67.28 115.93,76.4 v117.85,76.4 v117.86,76.4 118.62,77.17 123.93,77.17 124.97,78.21 J28.3
5V
  Top 0.152: D3.5 16.87,32.69 17.04,32.51 17.04,31.52 17.43,31.14 18.84,31.14 19.84,32.13 19.94,32.13
  Top 0.254: 40.51,23.64 C6.1 | J1.2 28.6,42.27 28.6,42.24
  Top 0.305: 40.51,23.64 40.49,23.66 U2.3 | U2.3 38.16,23.66 37.85,23.34 37.85,22.2 38.29,21.76 U2.1 | J3.VBUS2 14.92,38.37 16.03,39.47 18.85,39.47 19.82,38.49 J3.VBUS1 19.82,32.25 19.94,32.13 20.04,32.03 24.41,32.03 24.89,32.51 28.6,32.51 | 28.6,42.24 28.6,32.51 | 28.6,32.51 28.6,27.03 30.86,24.77 38.73,24.77 39.22,24.28 U2.3
5V1
  Top 0.152: D4.5 63.86,32.69 64.03,32.51 64.03,31.52 64.42,31.14 65.83,31.14 66.83,32.13 66.93,32.13
  Top 0.254: 87.5,23.64 C9.1 | J8.2 75.59,42.27 75.59,42.24
  Top 0.305: 87.5,23.64 87.48,23.66 U3.3 | U3.3 85.15,23.66 84.84,23.34 84.84,22.2 85.28,21.76 U3.1 | J10.VBUS2 61.91,38.37 63.02,39.47 65.84,39.47 66.81,38.49 J10.VBUS1 66.81,32.25 66.93,32.13 67.03,32.03 71.4,32.03 71.88,32.51 75.59,32.51 | 75.59,42.24 75.59,32.51 | 75.59,32.51 75.59,27.03 77.85,24.77 85.73,24.77 86.21,24.28 U3.3
5V2
  Top 0.152: D6.5 110.85,32.69 111.02,32.51 111.02,31.52 111.41,31.14 112.82,31.14 113.81,32.13 113.92,32.13
  Top 0.254: 134.49,23.64 C14.1 | J13.2 122.58,42.27 122.58,42.24
  Top 0.305: 134.49,23.64 134.47,23.66 U5.3 | U5.3 132.14,23.66 131.83,23.34 131.83,22.2 132.27,21.76 U5.1 | J15.VBUS2 108.9,38.37 110.01,39.47 112.83,39.47 113.8,38.49 J15.VBUS1 113.8,32.25 113.92,32.13 114.02,32.03 118.39,32.03 118.87,32.51 122.58,32.51 | 122.58,42.24 122.58,32.51 | 122.58,32.51 122.58,27.03 124.84,24.77 132.72,24.77 133.2,24.28 U5.3
5V3
  Top 0.152: D8.5 16.87,72.54 17.04,72.37 17.04,71.37 17.43,70.99 18.84,70.99 19.84,71.98 19.94,71.98
  Top 0.254: 40.51,63.49 C19.1 | J18.2 28.6,82.12 28.6,82.09
  Top 0.305: 40.51,63.49 40.49,63.51 U7.3 | U7.3 38.16,63.51 37.85,63.2 37.85,62.05 38.29,61.61 U7.1 | J20.VBUS2 14.92,78.22 16.03,79.32 18.85,79.32 19.82,78.35 J20.VBUS1 19.82,72.1 19.94,71.98 20.04,71.88 24.41,71.88 24.89,72.37 28.6,72.37 | 28.6,82.09 28.6,72.37 | 28.6,72.37 28.6,66.88 30.86,64.62 38.73,64.62 39.22,64.13 U7.3
5V4
  Top 0.152: D10.5 63.86,72.54 64.03,72.37 64.03,71.37 64.42,70.99 65.83,70.99 66.83,71.98 66.93,71.98
  Top 0.254: 87.5,63.49 C24.1 | J23.2 75.59,82.12 75.59,82.09
  Top 0.305: 87.5,63.49 87.48,63.51 U9.3 | U9.3 85.15,63.51 84.84,63.2 84.84,62.05 85.28,61.61 U9.1 | J25.VBUS2 61.91,78.22 63.02,79.32 65.84,79.32 66.81,78.35 J25.VBUS1 66.81,72.1 66.93,71.98 67.03,71.88 71.4,71.88 71.88,72.37 75.59,72.37 | 75.59,82.09 75.59,72.37 | 75.59,72.37 75.59,66.88 77.85,64.62 85.73,64.62 86.21,64.13 U9.3
5V5
  Top 0.152: D12.5 110.85,72.54 111.02,72.37 111.02,71.37 111.41,70.99 112.82,70.99 113.81,71.98 113.92,71.98
  Top 0.254: 134.49,63.49 C29.1 | J28.2 122.58,82.12 122.58,82.09
  Top 0.305: 134.49,63.49 134.47,63.51 U11.3 | U11.3 132.14,63.51 131.83,63.2 131.83,62.05 132.27,61.61 U11.1 | J30.VBUS2 108.9,78.22 110.01,79.32 112.83,79.32 113.8,78.35 J30.VBUS1 113.8,72.1 113.92,71.98 114.02,71.88 118.39,71.88 118.87,72.37 122.58,72.37 | 122.58,82.09 122.58,72.37 | 122.58,72.37 122.58,66.88 124.84,64.62 132.72,64.62 133.2,64.13 U11.3
!RESET  (via drill 0.3)
  Top 0.152: v34.49,25.3 34.1,25.69 U1.8
  Bottom 0.152: JP15.3 25.6,10.36 33.43,10.36 35.08,12.02 35.08,19 33.53,20.55 33.53,24.33 v34.49,25.3
!RESET1  (via drill 0.3)
  Top 0.152: v81.48,25.3 81.09,25.69 U4.8
  Bottom 0.152: JP11.3 72.59,10.36 80.42,10.36 82.07,12.02 82.07,19 80.52,20.55 80.52,24.33 v81.48,25.3
!RESET2  (via drill 0.3)
  Top 0.152: v128.47,25.3 128.08,25.69 U6.8
  Bottom 0.152: JP23.3 119.58,10.36 127.41,10.36 129.06,12.02 129.06,19 127.51,20.55 127.51,24.33 v128.47,25.3
!RESET3  (via drill 0.3)
  Top 0.152: v34.49,65.15 34.1,65.54 U8.8
  Bottom 0.152: JP34.3 25.6,50.22 33.43,50.22 35.08,51.87 35.08,58.85 33.53,60.4 33.53,64.19 v34.49,65.15
!RESET4  (via drill 0.3)
  Top 0.152: v81.48,65.15 81.09,65.54 U10.8
  Bottom 0.152: JP44.3 72.59,50.22 80.42,50.22 82.07,51.87 82.07,58.85 80.52,60.4 80.52,64.19 v81.48,65.15
!RESET5  (via drill 0.3)
  Top 0.152: v128.47,65.15 128.08,65.54 U12.8
  Bottom 0.152: JP54.3 119.58,50.22 127.41,50.22 129.06,51.87 129.06,58.85 127.51,60.4 127.51,64.19 v128.47,65.15
!SAFE  (via drill 0.3)
  Top 0.152: v35.85,15.5 35.26,16.09 U1.1
  Bottom 0.152: JP15.2 27.76,9.98 33.68,9.98 35.87,12.17 35.87,15.49 v35.85,15.5
!SAFE1  (via drill 0.3)
  Top 0.152: v82.84,15.5 82.25,16.09 U4.1
  Bottom 0.152: JP11.2 74.75,9.98 80.67,9.98 82.86,12.17 82.86,15.49 v82.84,15.5
!SAFE2  (via drill 0.3)
  Top 0.152: v129.83,15.5 129.24,16.09 U6.1
  Bottom 0.152: JP23.2 121.74,9.98 127.66,9.98 129.84,12.17 129.84,15.49 v129.83,15.5
!SAFE3  (via drill 0.3)
  Top 0.152: v35.85,55.36 35.26,55.94 U8.1
  Bottom 0.152: JP34.2 27.76,49.83 33.68,49.83 35.87,52.02 35.87,55.34 v35.85,55.36
!SAFE4  (via drill 0.3)
  Top 0.152: v82.84,55.36 82.25,55.94 U10.1
  Bottom 0.152: JP44.2 74.75,49.83 80.67,49.83 82.86,52.02 82.86,55.34 v82.84,55.36
!SAFE5  (via drill 0.3)
  Top 0.152: v129.83,55.36 129.24,55.94 U12.1
  Bottom 0.152: JP54.2 121.74,49.83 127.66,49.83 129.84,52.02 129.84,55.34 v129.83,55.36
D+
  Top 0.152: R9.1 16.37,32.15 D3.4
D+1
  Top 0.152: R26.1 63.36,32.15 D4.4
D+2
  Top 0.152: R42.1 110.35,32.15 D6.4
D+3
  Top 0.152: R58.1 16.37,72 D8.4
D+4
  Top 0.152: R74.1 63.36,72 D10.4
D+5
  Top 0.152: R90.1 110.35,72 D12.4
D-
  Top 0.152: R10.1 17.37,32.61 D3.6
D-1
  Top 0.152: R27.1 64.36,32.61 D4.6
D-2
  Top 0.152: R43.1 111.35,32.61 D6.6
D-3
  Top 0.152: R59.1 17.37,72.46 D8.6
D-4
  Top 0.152: R75.1 64.36,72.46 D10.6
D-5
  Top 0.152: R91.1 111.35,72.46 D12.6
D_SEL  (via drill 0.3)
  Top 0.152: U1.2 34.99,17.19 v35.69,17.88 36.55,17.88
  Top 0.254: 36.55,17.88 R16.1
  Bottom 0.152: SPI.2 35.66,17.86 v35.69,17.88
D_SEL1  (via drill 0.3)
  Top 0.152: U4.2 81.98,17.19 v82.68,17.88 83.54,17.88
  Top 0.254: 83.54,17.88 R31.1
  Bottom 0.152: SPI1.2 82.65,17.86 v82.68,17.88
D_SEL2  (via drill 0.3)
  Top 0.152: U6.2 128.97,17.19 v129.67,17.88 130.53,17.88
  Top 0.254: 130.53,17.88 R47.1
  Bottom 0.152: SPI2.2 129.64,17.86 v129.67,17.88
D_SEL3  (via drill 0.3)